# EAGLE board photo (EAGLE 9.6.2)
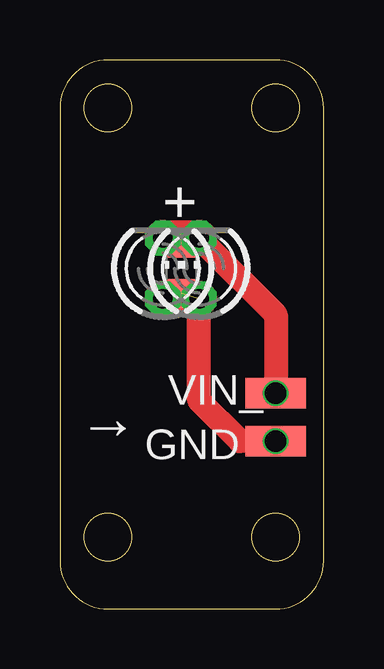
[diagram p0: board, top side]
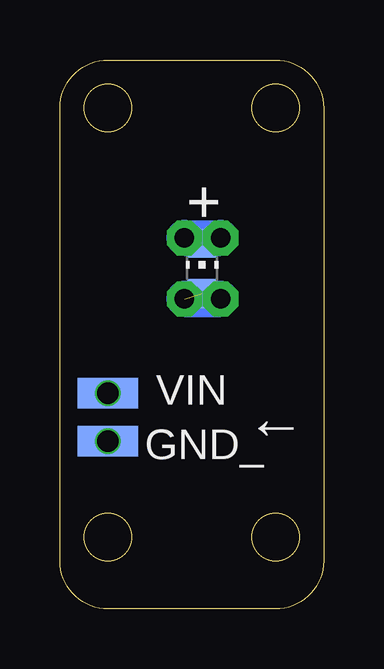
[diagram p1: board, bottom side, seen from below]

Size 11 x 22.89 mm. Coordinates in mm from the lower left corner, seen from the top.
Outline: 9,22.89 2,22.89 arc90 0,20.89 0,2 arc90 2,0 9,0 arc90 11,2 11,20.89 arc90 9,22.89
Outline: circle at 9,3 radius 1
Outline: circle at 9,20.89 radius 1
Outline: circle at 2,3 radius 1
Outline: circle at 2,20.89 radius 1
Copper layers (1*16): Top 0.035mm / dielectric 1.6mm / Bottom 0.035mm
Design rules "jlcpcb-2layers": minimum track width 5mil, minimum drill 0.3mm, track to track 5mil, track to pad 5mil, pad to pad 5mil, via to via 5mil, smd to smd 5mil, copper to edge 0.2mm, drill to drill 6mil, minimum pad ring 10mil, minimum via ring 3mil, stop-mask expansion 4mil, vias tented up to drill 0mil, thermal gap 10mil

## Footprints (pad centres in the part's own frame; a part is rotated, then mirrored left to right if it is on the bottom)
SMD1,27-2,54 = smd 1.27 x 2.54: 1 0,0
LED3MM = drill 0.813 octagon: A -1.27,0; K 1.27,0
CHIP-LED0805 = smd 1.2 x 1.2: A 0,-1.05; C 0,1.05

## Placement (x,y rotation side)
GND  [SMD1,27-2,54]  9,7 270 top
GND_  [SMD1,27-2,54]  9,7 90 bottom
LED2  TLLR4400  [LED3MM]  4.29,14.2 90 top
LED3  [CHIP-LED0805]  5.07,14.2 0 bottom
LED4  TLLR4400  [LED3MM]  5.8,14.2 90 top
LED5  [CHIP-LED0805]  5.07,14.2 0 top
VIN  [SMD1,27-2,54]  9,9 270 bottom
VIN_  [SMD1,27-2,54]  9,9 90 top

## Library data of the parts
GND GND_ VIN VIN_ = wirepad
LED2 LED4 = led; MF: VISHAY SEMICONDUCTOR; OC_FARNELL: 1612437
LED3 LED5 = led

## Nets
N$3: LED2.K LED3.C LED4.K LED5.C VIN.1 VIN_.1
N$5: GND.1 GND_.1 LED2.A LED3.A LED4.A LED5.A

## Tracks (layer width: path | path; a pad name or v marks a point on that pad's centre or on a via)
N$3  (via drill 0.9)  (1 unrouted)
  Top 0.5: LED4.K LED5.C
  Top 1: LED4.K 9,12.27 VIN_.1
  Top 1.5: LED2.K LED4.K
  Bottom 1.5: LED4.K LED2.K
  other vias: 9,9
N$5  (via drill 0.9)  (2 unrouted)
  Top 1: GND_.1 7.5,7 5.8,8.7 LED4.A
  Top 1.5: LED4.A LED2.A
  Bottom 1.5: LED4.A LED2.A
  other vias: 9,7

## Text on the board
tPlace: + | →
bPlace: + | ←